# EAGLE board me433_2017_1_d (EAGLE 8.1.0)
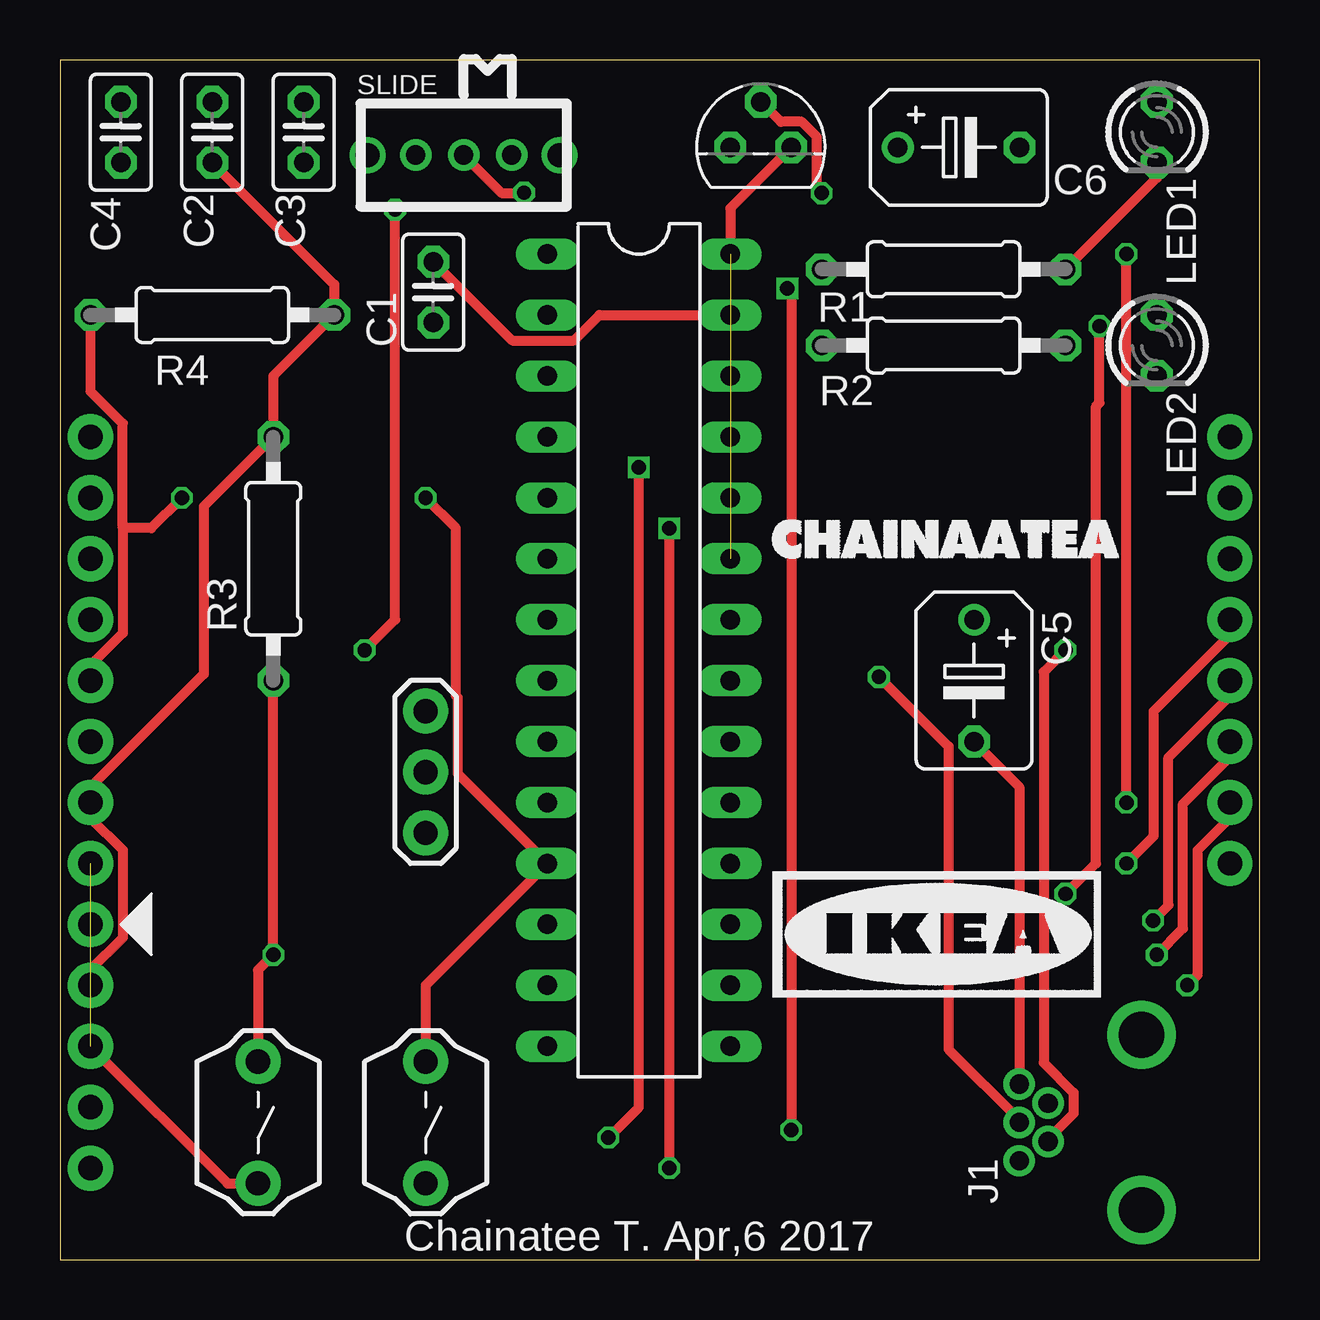
[diagram p0: board, top side]
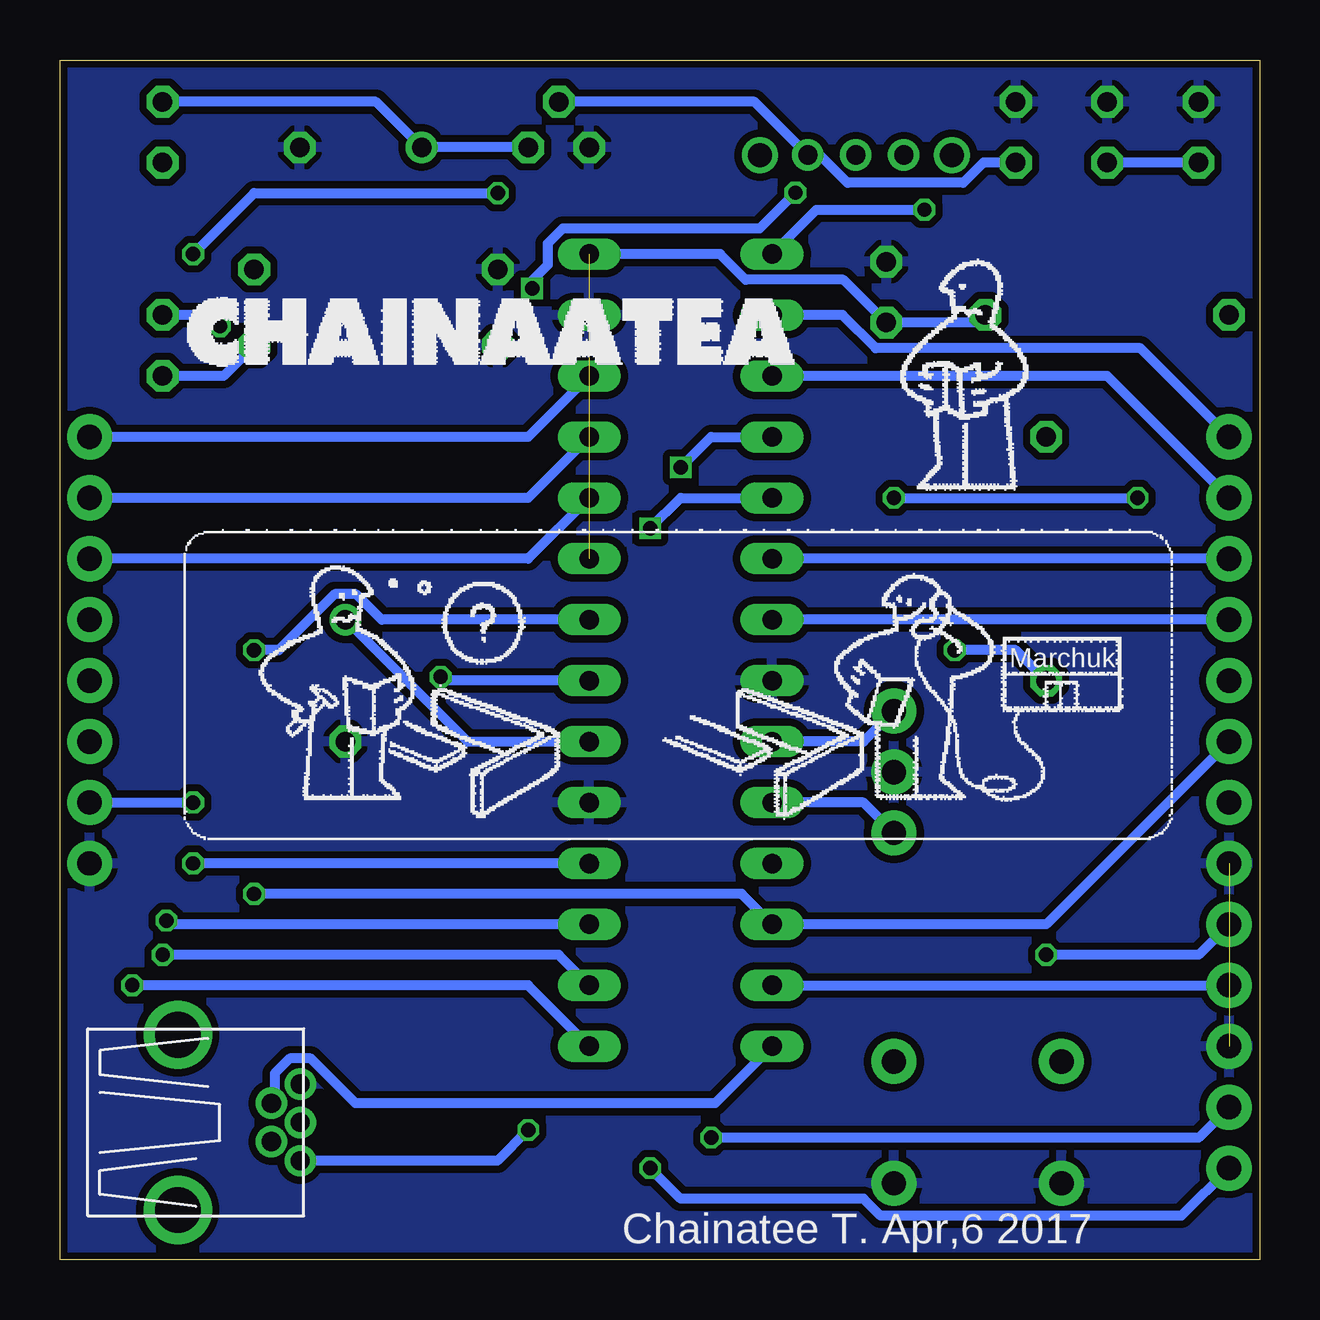
[diagram p1: board, bottom side, seen from below]

Size 50 x 50 mm. Coordinates in mm from the lower left corner, seen from the top.
Outline: 0,0 50,0 50,50 0,50 0,0
Copper layers (1*16): Top 0.035mm / dielectric 1.5mm / Bottom 0.035mm
Design rules "SeeedStudio_2layer_DRU_no_angle_20140221": minimum track width 6mil, minimum drill 12mil, track to track 6mil, track to pad 6mil, pad to pad 6mil, via to via 6mil, smd to smd 0mil, copper to edge 10mil, drill to drill 10mil, minimum pad ring 10mil, minimum via ring 6mil, stop-mask expansion 2mil, vias tented up to drill 100mil, thermal gap 10mil

## Footprints (pad centres in the part's own frame; a part is rotated, then mirrored left to right if it is on the bottom)
C025-025X050 = drill 0.813 octagon: 1 -1.27,0; 2 1.27,0
B45181B = drill 0.813: + -2.54,0 | drill 0.813 octagon: - 2.54,0
USB-MB-H = drill 0.8: D+ 5.1,0; D- 3.9,0.8; GND 5.1,-1.6; ID 3.9,-0.8; VBUS 5.1,1.6 | drill 1.9: P$6 0,-3.65; P$7 0,3.65
LED3MM = drill 0.813 octagon: A -1.27,0; K 1.27,0
0207/10 = drill 0.813 octagon: 1 -5.08,0; 2 5.08,0
DIL28-3 = drill 0.813 long: 1 -16.51,-3.81; 2 -13.97,-3.81; 3 -11.43,-3.81; 4 -8.89,-3.81; 5 -6.35,-3.81; 6 -3.81,-3.81; 7 -1.27,-3.81; 8 1.27,-3.81; 9 3.81,-3.81; 10 6.35,-3.81; 11 8.89,-3.81; 12 11.43,-3.81; 13 13.97,-3.81; 14 16.51,-3.81; 15 16.51,3.81; 16 13.97,3.81; 17 11.43,3.81; 18 8.89,3.81; 19 6.35,3.81; 20 3.81,3.81; 21 1.27,3.81; 22 -1.27,3.81; 23 -3.81,3.81; 24 -6.35,3.81; 25 -8.89,3.81; 26 -11.43,3.81; 27 -13.97,3.81; 28 -16.51,3.81
SLIDE = drill 0.8: 1 -2,0; 2 0,0; 3 2,0 | drill 1: P$1 -4,0; P$2 4,0
TO92 = drill 0.813 octagon: 1 -1.27,0; 2 0,1.905; 3 1.27,0
PB = drill 1.016 pad 1.88: 1 -2.54,0; 2 2.54,0
1X08 = drill 1.016 pad 1.88: 1 0,0; 2 2.54,0; 3 5.08,0; 4 7.62,0; 5 10.16,0; 6 12.7,0; 7 15.24,0; 8 17.78,0
1X05 = drill 1.016 pad 1.88: 1 0,0; 2 2.54,0; 3 5.08,0; 4 7.62,0; 5 10.16,0
OSC = drill 1.016 pad 1.88: 1 -2.54,0; 2 0,0; 3 2.54,0

## Placement (x,y rotation side)
C1  0.1uF  [C025-025X050]  15.56,40.32 90 top
C2  0.1uF  [C025-025X050]  6.35,46.99 90 top
C3  0.1uF  [C025-025X050]  10.16,46.99 90 top
C4  0.1uF  [C025-025X050]  2.54,46.99 90 top
C5  10uF  [B45181B]  38.1,24.13 270 top
C6  10uF  [B45181B]  37.47,46.35 0 top
J1  USB-MB-H  [USB-MB-H]  45.09,5.71 180 top
LED1  Red  [LED3MM]  45.72,46.99 270 top
LED2  Green  [LED3MM]  45.72,38.1 270 top
R1  330  [0207/10]  36.83,41.27 0 top
R2  330  [0207/10]  36.83,38.1 0 top
R3  10k  [0207/10]  8.89,29.21 90 top
R4  10k  [0207/10]  6.35,39.37 0 top
U$1  PIC32MX250F128B  [DIL28-3]  24.13,25.4 270 top
U$2  SLIDE  [SLIDE]  16.83,46.04 0 top
U$3  MCP1702  [TO92]  29.21,46.35 0 top
U$4  RESET  [PB]  8.26,5.71 270 top
U$5  USER  [PB]  15.24,5.71 270 top
U$6  CONN_08  [1X08]  48.77,16.51 90 top
U$7  CONN_08  [1X08]  1.27,16.51 90 top
U$8  PICKIT3  [1X05]  1.27,13.97 270 top
U$9  8MHz  [OSC]  15.24,20.32 270 top

## Library data of the parts
C1-C6 J1 R1-R4 U$1-U$9 = me433_2017_1
LED1 LED2 = led

## Nets
+3V3: C1.1 C2.1 C4.1 C6.+ LED1.A R3.2 R4.2 U$1.13 U$1.23 U$1.28 U$3.3 U$7.2 U$8.2
+5V: C3.1 U$1.15 U$2.3 U$3.2 U$6.2
A0: U$1.2 U$7.8
A1: U$1.3 U$7.7
A4/LED: LED2.A U$1.12 U$7.3
B2: U$1.6 U$7.6
B3: U$1.7 U$7.5
B4/USER: R4.1 U$1.11 U$5.1 U$7.4
B7: U$1.16 U$6.3
B8: U$1.17 U$6.4
B9: U$1.18 U$6.5
B13: U$1.24 U$6.6
B14: U$1.25 U$6.7
B15: U$1.26 U$6.8
D+: J1.D+ U$1.21
D-: J1.D- U$1.22
GND: C1.2 C2.2 C3.2 C4.2 C5.- C6.- J1.GND R1.1 R2.1 U$1.8 U$1.19 U$1.27 U$3.1 U$4.2 U$5.2 U$6.1 U$7.1 U$8.3 U$9.2
MCLR: R3.1 U$1.1 U$4.1 U$8.1
N$1: LED2.K R2.2
N$2: C5.+ U$1.20
N$3: LED1.K R1.2
N$4: U$1.9 U$9.1
N$5: U$1.10 U$9.3
PGC: U$1.5 U$8.5
PGD: U$1.4 U$8.4
USBID: J1.ID U$1.14
VBUS: J1.VBUS U$2.2

## Tracks (layer width: path | path; a pad name or v marks a point on that pad's centre or on a via)
+3V3  (1 unrouted)
  Top 0.406: U$3.3 27.94,43.81 U$1.28 | U$8.2 1.27,12.07 2.62,13.41 2.62,17.07 1.27,18.41 U$7.2 1.27,19.69 5.99,24.41 5.99,31.39 R3.2 8.89,36.83 R4.2 11.43,40.64 C2.1
  Bottom 0.406: C4.1 C2.1 | U$3.3 C6.+ 36.83,48.26 LED1.A | R4.2 11.75,39.05 C1.1 17.35,40.84 21.42,40.84 22.49,41.91 U$1.28 | U$1.13 U$8.2
+5V  (via drill 0.6)
  Top 0.406: U$6.2 48.77,18.41 47.42,17.07 47.42,11.86 v46.99,11.43 | v44.45,19.05 v44.45,41.91 | v31.75,44.45 31.55,44.65 31.55,46.8 30.92,47.42 30.05,47.42 U$3.2
  Bottom 0.406: C3.1 11.5,45.72 12.35,44.88 17.17,44.88 18.33,46.04 U$2.3 21.05,48.26 U$3.2 | U$1.15 30.48,11.43 v46.99,11.43 | U$6.2 v44.45,19.05 | v44.45,41.91 41.91,44.45 v31.75,44.45
A0
  Bottom 0.406: U$1.2 17.38,39.37 16,37.99 4.97,37.99 U$7.8
A1
  Bottom 0.406: U$7.7 6.35,36.83 U$1.3
A4/LED  (via drill 0.6)
  Top 0.406: v41.91,15.24 43.18,16.51 43.18,35.56 43.33,35.71 v43.33,38.91
  Bottom 0.406: v41.91,15.24 21.59,15.24 U$1.12 8.89,13.97 U$7.3 | v43.33,38.91 43.8,39.37 LED2.A
B2
  Bottom 0.406: U$7.6 U$1.6
B3
  Bottom 0.406: U$7.5 U$1.7
B4/USER  (via drill 0.6)
  Top 0.406: U$5.1 15.24,11.43 U$1.11 16.59,20.24 16.59,23.42 16.51,23.49 16.51,30.48 v15.24,31.75 | R4.1 1.27,36.19 2.62,34.85 2.62,30.48 | U$7.4 1.27,24.77 2.62,26.11 2.62,30.48 | v5.08,31.75 3.81,30.48 2.62,30.48
  Bottom 0.406: v15.24,31.75 v5.08,31.75
B7  (via drill 0.6)
  Top 0.406: U$6.3 48.77,20.95 46.81,19 46.81,13.79 v45.72,12.7
  Bottom 0.406: U$1.16 29.21,12.7 v45.72,12.7
B8  (via drill 0.6)
  Top 0.406: v45.56,14.13 46.2,14.76 46.2,20.93 48.77,23.49 U$6.4
  Bottom 0.406: U$1.17 45.72,13.97 v45.56,14.13
B9  (via drill 0.6)
  Top 0.406: v44.45,16.51 45.59,17.65 45.59,22.86 48.77,26.03 U$6.5
  Bottom 0.406: U$1.18 v44.45,16.51
B13
  Bottom 0.406: U$1.24 30.48,29.21 U$6.6
B14
  Bottom 0.406: U$1.25 30.48,31.75 U$6.7
B15
  Bottom 0.406: U$1.26 30.48,34.29 U$6.8
D+  (via drill 0.6)
  Top 0.406: v34.13,24.29 37.03,21.39 37.03,8.77 39.98,5.82 J1.D+
  Bottom 0.406: U$1.21 34.29,24.13 v34.13,24.29
D-  (via drill 0.6)
  Top 0.406: J1.D- 41.19,5.01 42.24,6.08 42.24,6.95 41,8.2 41,24.49 v41.91,25.4
  Bottom 0.406: U$1.22 36.59,26.67 37.66,27.74 38.54,27.74 40.88,25.4 v41.91,25.4
GND  (1 unrouted)
  Top 0.406: C5.- 39.98,19.7 J1.GND | U$1.27 22.49,39.37 21.42,38.3 18.85,38.3 C1.2 | U$8.3 6.99,3.17 U$4.2
  pour Bottom (isolate 0.305): 0,49.53 0,0 49.53,0 50.16,0 50.16,50.16 0,50.16
MCLR  (via drill 0.6)
  Top 0.406: U$4.1 8.26,12.06 v8.89,12.7 R3.1 | v12.7,25.4 13.97,26.67 v13.97,43.76 | v13.97,43.76 13.97,43.81 v13.97,43.76
  Bottom 0.406: U$8.1 2.54,12.7 v8.89,12.7 | R3.1 10.16,25.4 v12.7,25.4 | U$1.1 18.47,43.76 v13.97,43.76
N$1
  Bottom 0.406: R2.2 43.18,36.83 LED2.K
N$2
  Bottom 0.406: C5.+ 33.02,21.59 U$1.20
N$3
  Top 0.406: R1.2 45.72,45.09 LED1.K
N$4
  Bottom 0.406: U$9.1 16.51,21.59 U$1.9
N$5
  Bottom 0.406: U$9.3 16.51,19.05 U$1.10
PGC  (via drill 0.6)
  Top 0.406: v25.4,3.81 v25.4,30.48
  Bottom 0.406: U$8.5 3.25,1.83 15.8,1.83 16.51,2.54 24.13,2.54 v25.4,3.81 | v25.4,30.48 24.13,31.75 U$1.5
PGD  (via drill 0.6)
  Top 0.406: v22.86,5.08 24.13,6.35 v24.13,33.02
  Bottom 0.406: U$8.4 2.54,5.08 v22.86,5.08 | v24.13,33.02 22.86,34.29 U$1.4
USBID
  Bottom 0.406: U$1.14 22.7,6.51 37.69,6.51 39.55,8.38 40.42,8.38 41.05,7.75 41.05,6.66 J1.ID
VBUS  (via drill 0.6)
  Top 0.406: U$2.2 18.41,44.45 19.05,44.45 19.07,44.47 v19.34,44.47 | v30.32,40.48 30.48,40.32 v30.48,5.4
  Bottom 0.406: v19.34,44.47 20.83,42.98 29.04,42.98 29.67,42.35 29.67,41.45 30.48,40.64 v30.32,40.48 | v30.48,5.4 31.76,4.12 J1.VBUS

## Text on the board
tPlace: Chainatee T. Apr,6 2017
bPlace: Marchuk | Chainatee T. Apr,6 2017